# Altium PCB Copy of corePCB3.PcbDoc (part 1 of 3)
Units mil, origin at the board's own origin, x right, y up, seen from the top; angles counter-clockwise.
Board outline 6000 x 4000 mil, 6 copper layers (Top Layer, Layer 3, Layer 1, Layer 2, Layer 4, Bottom Layer), stack 32.111 mil thick; 90 components, 166 nets, 637 pads, 472 vias.
Unrouted connection lines stored in the file: 122.
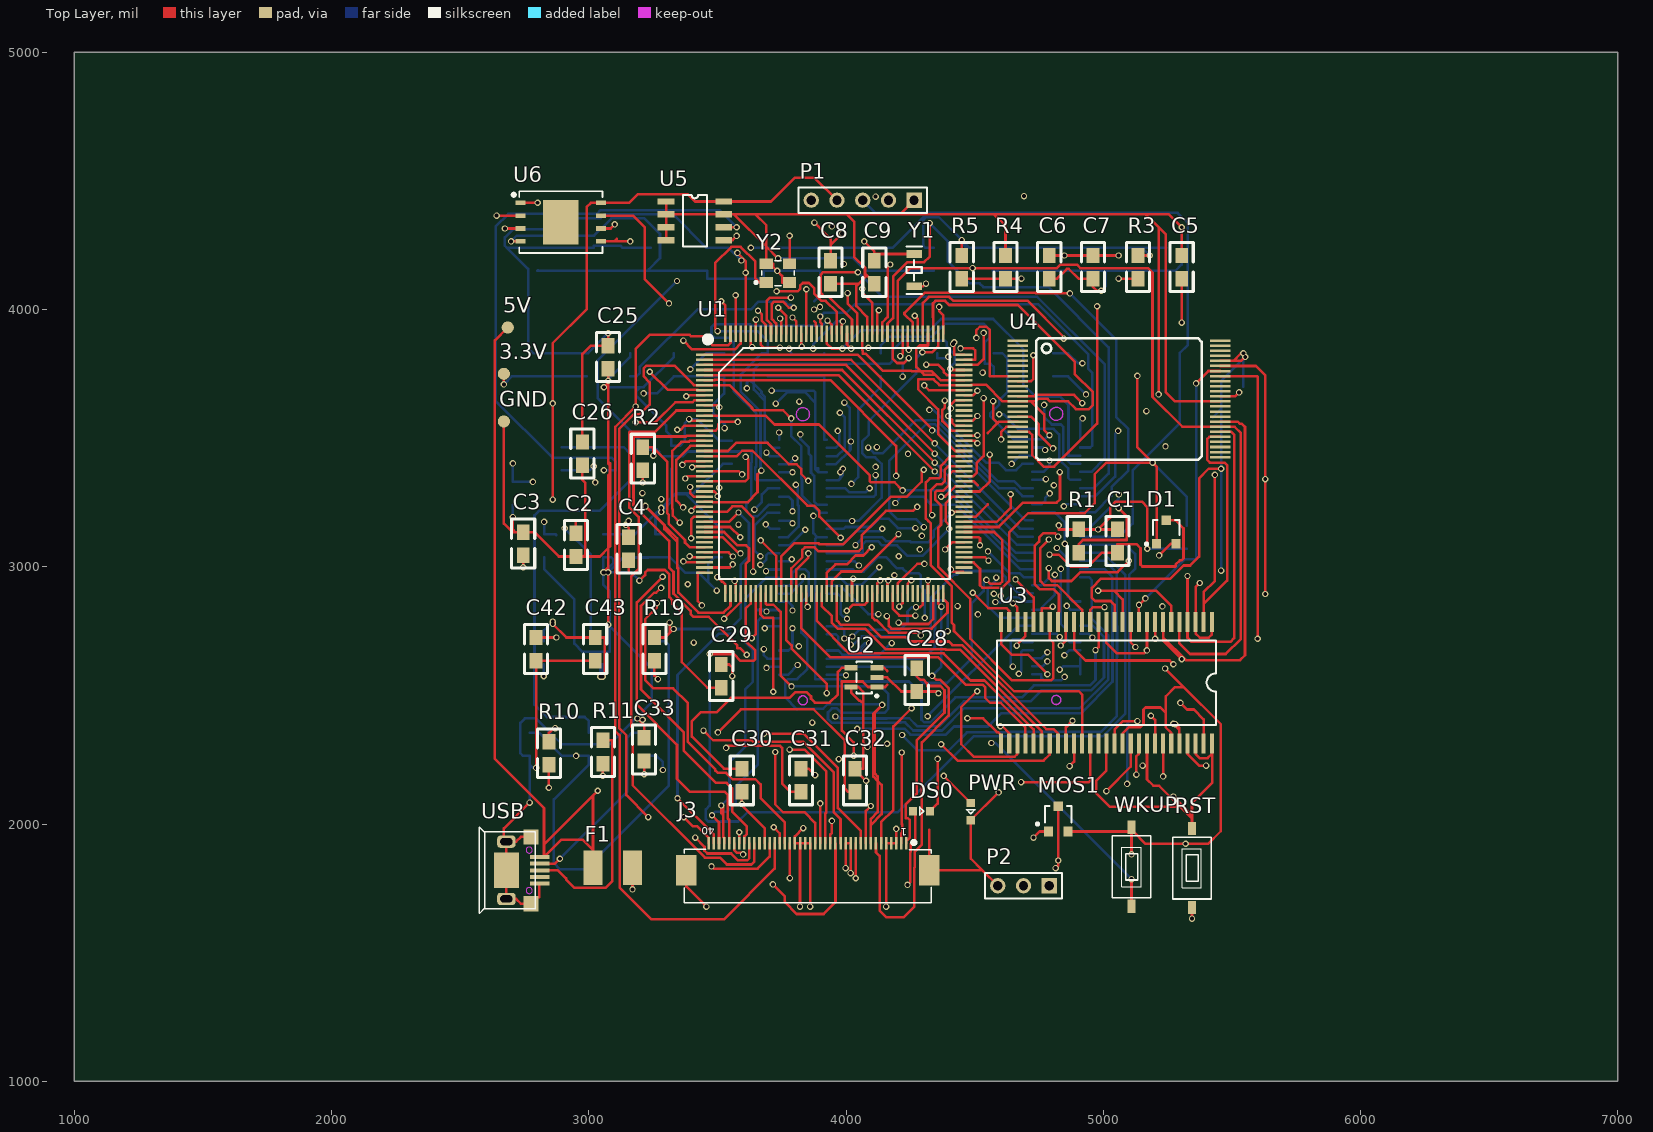
[diagram p0: Top Layer view]
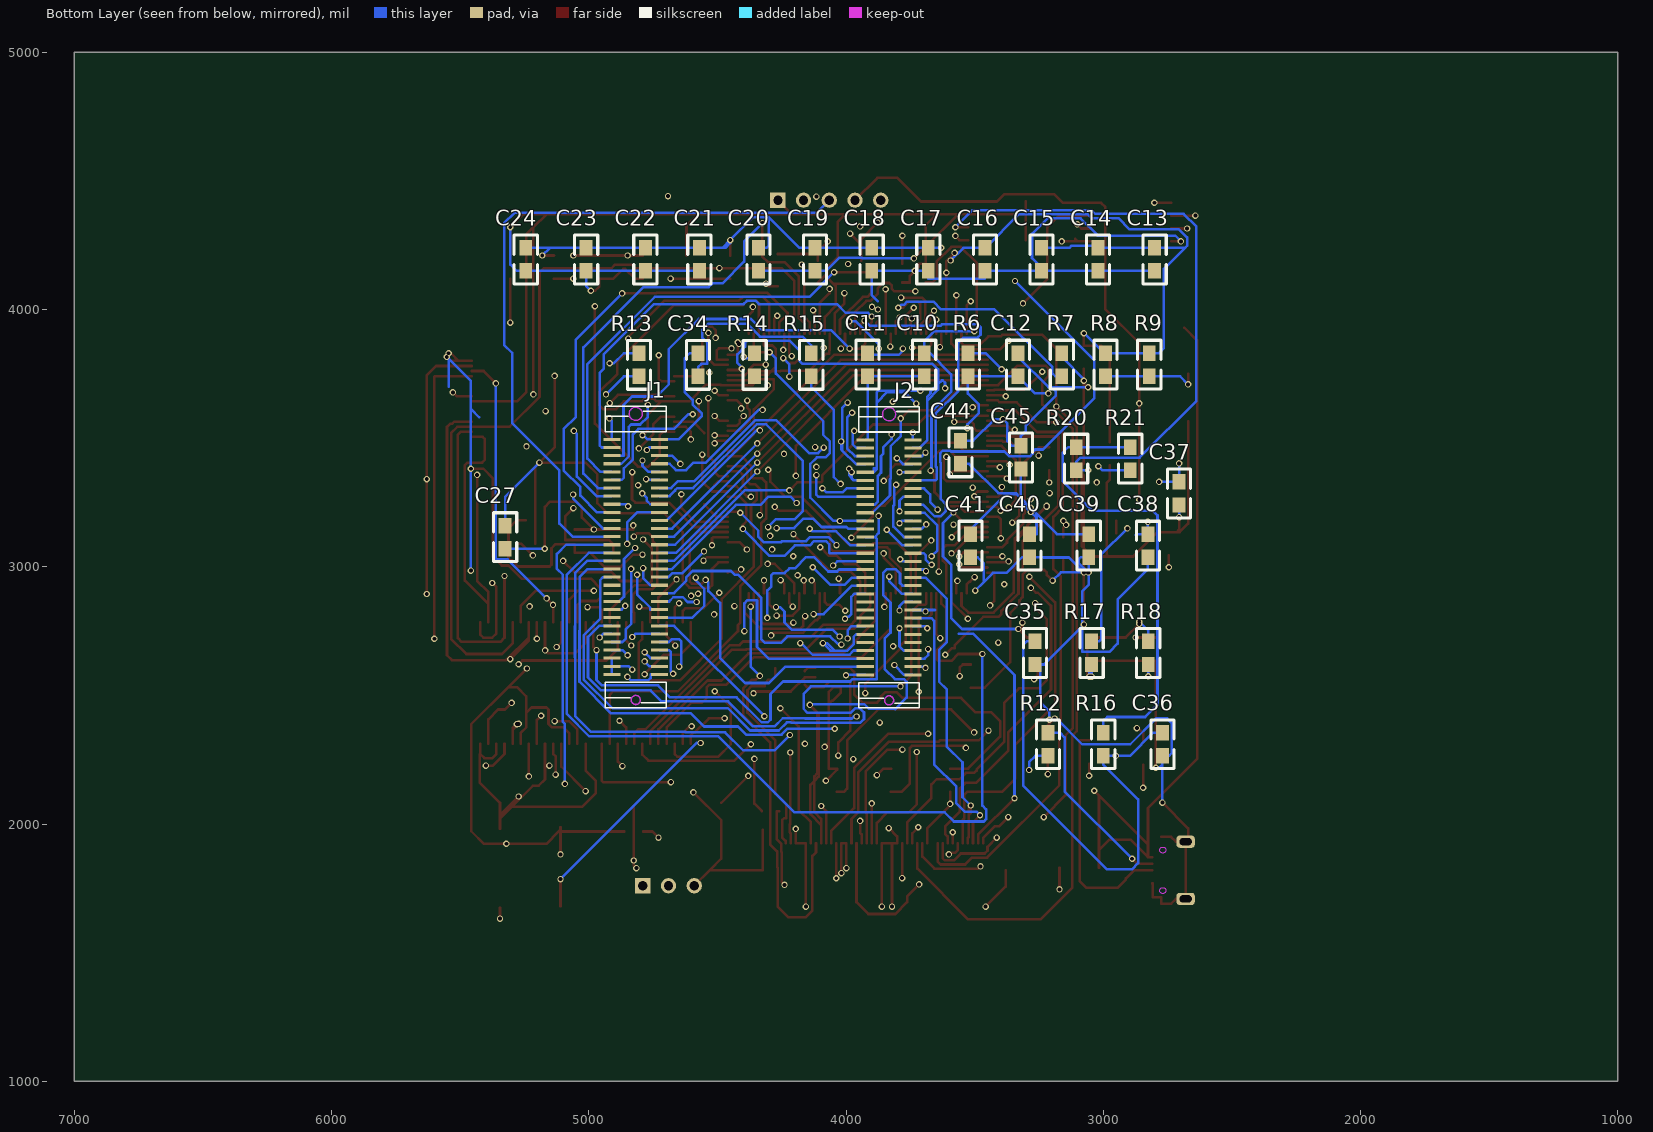
[diagram p1: Bottom Layer view, seen from below]
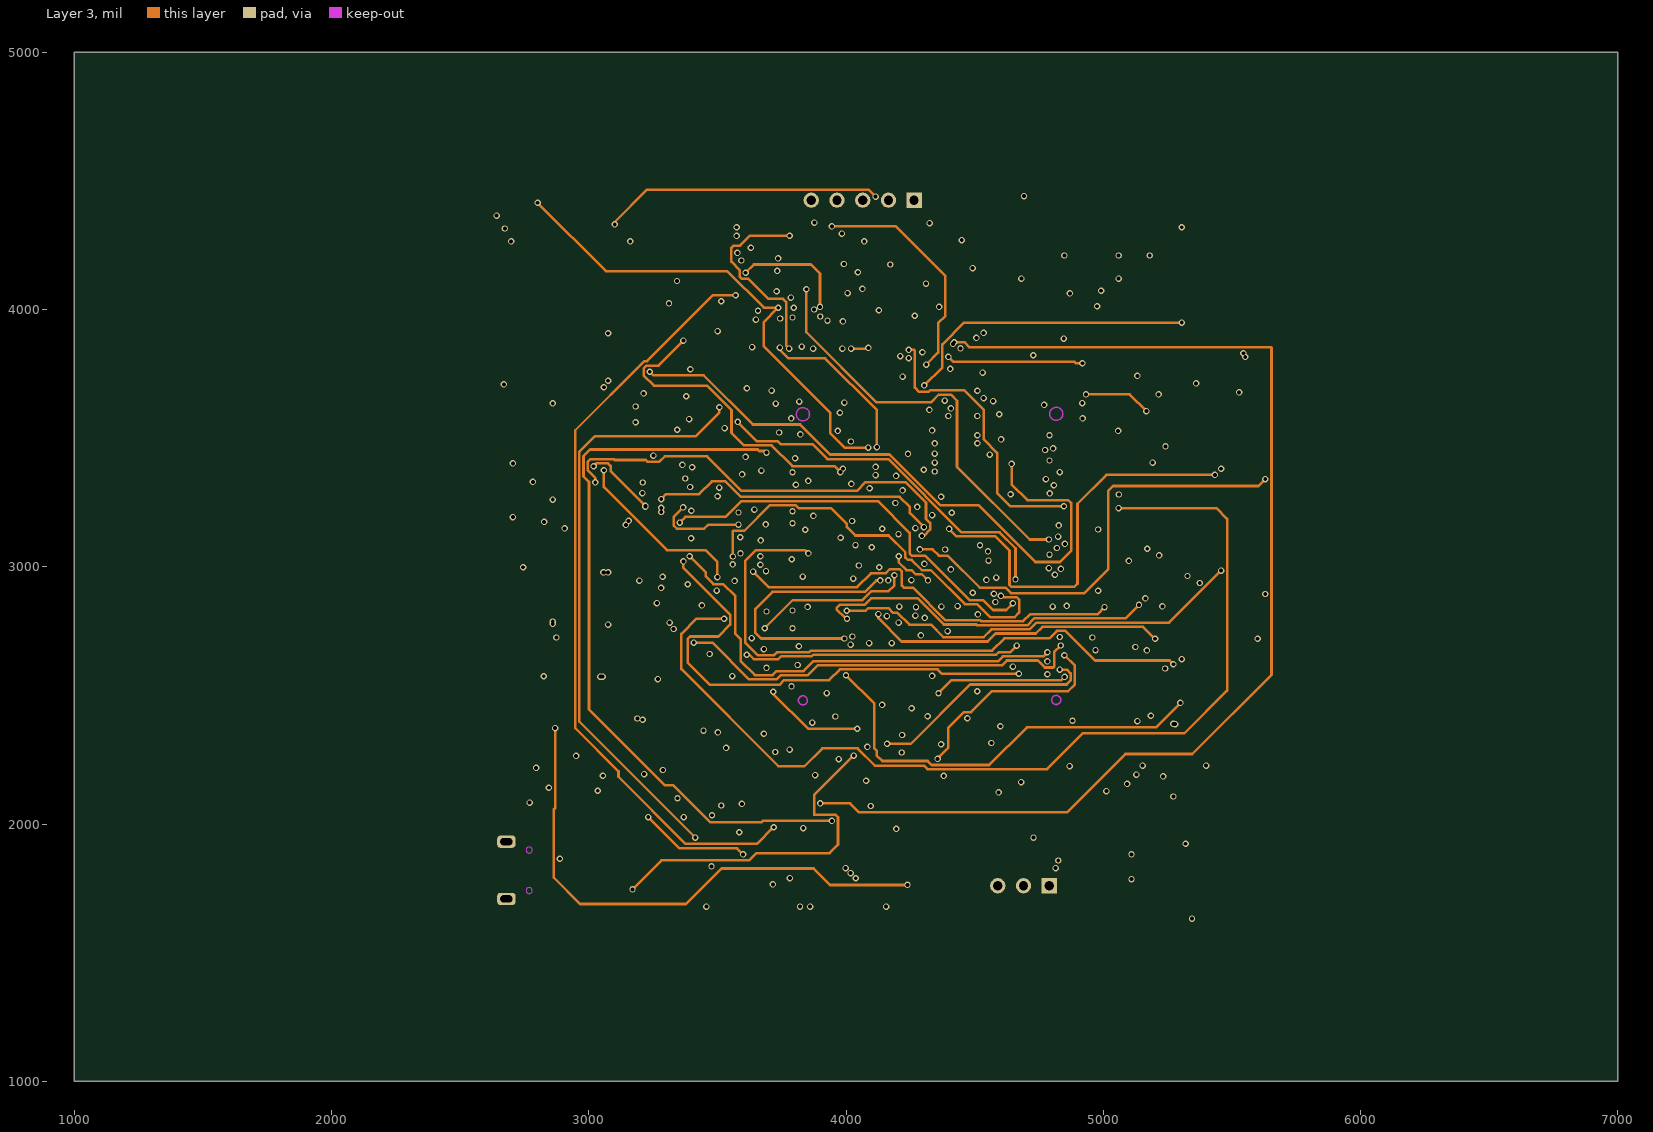
[diagram p2: Layer 3]
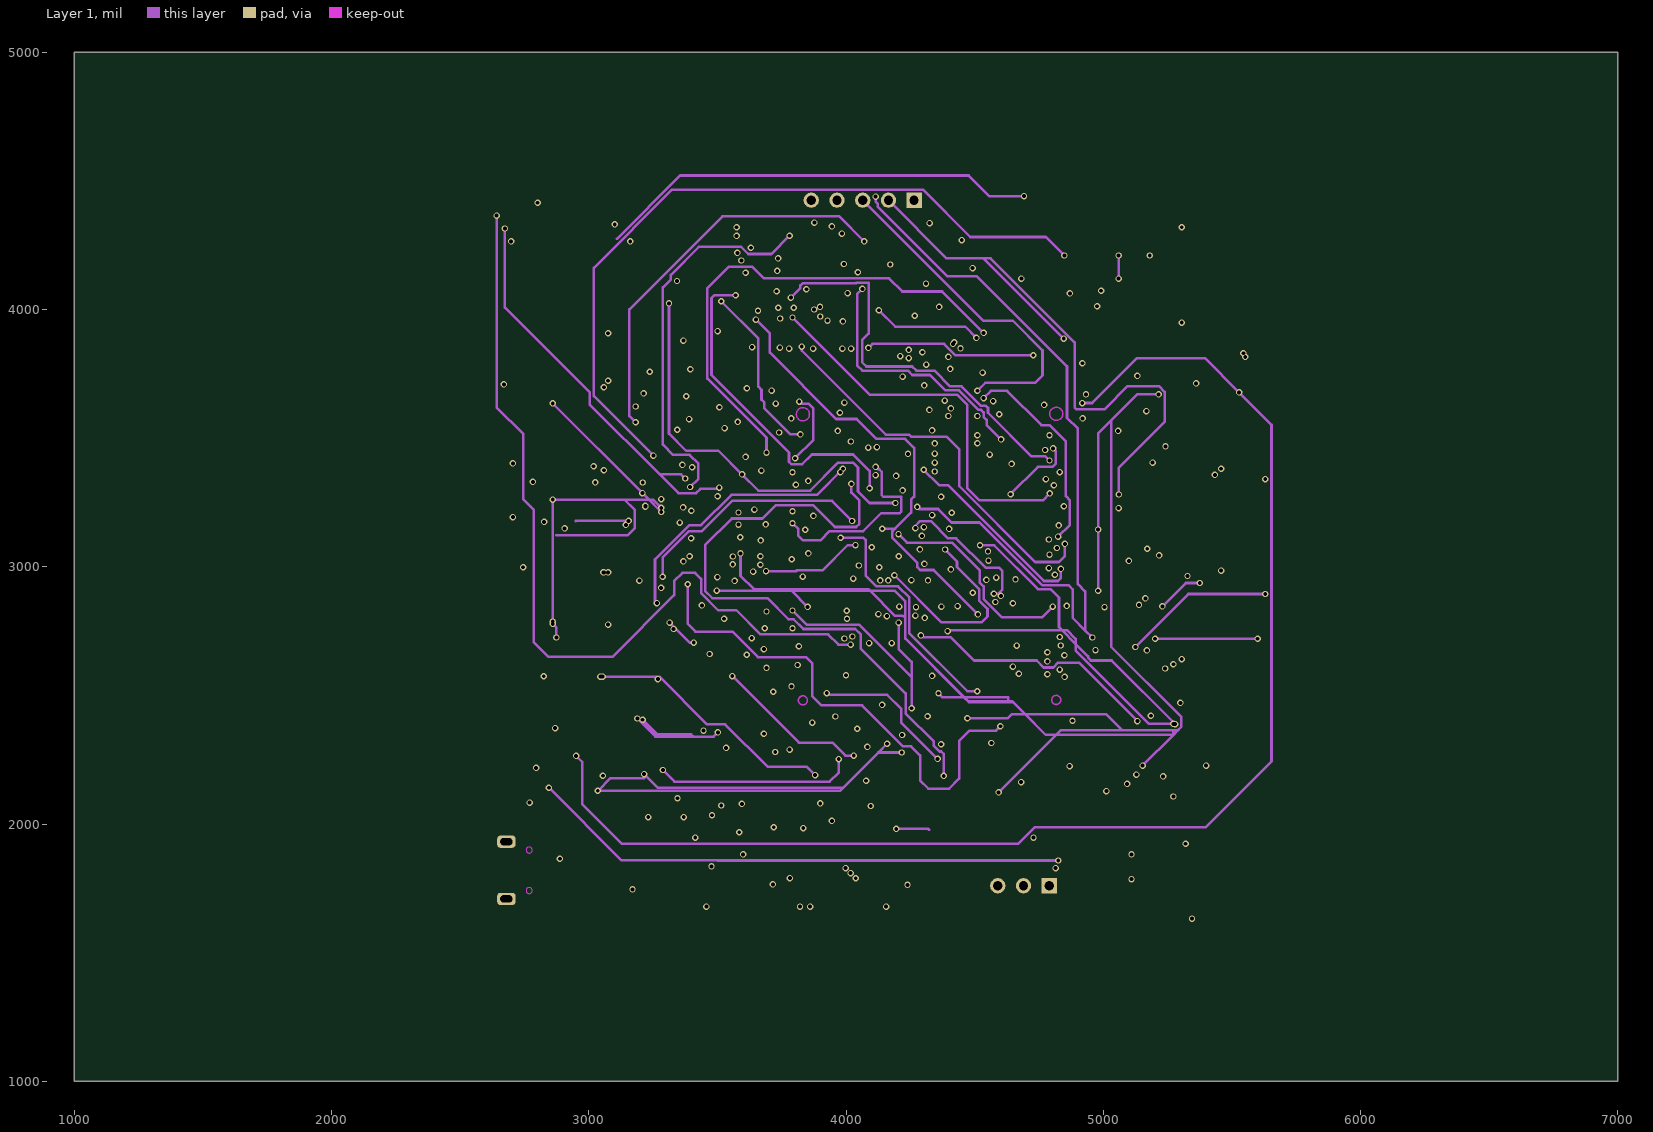
[diagram p3: Layer 1]
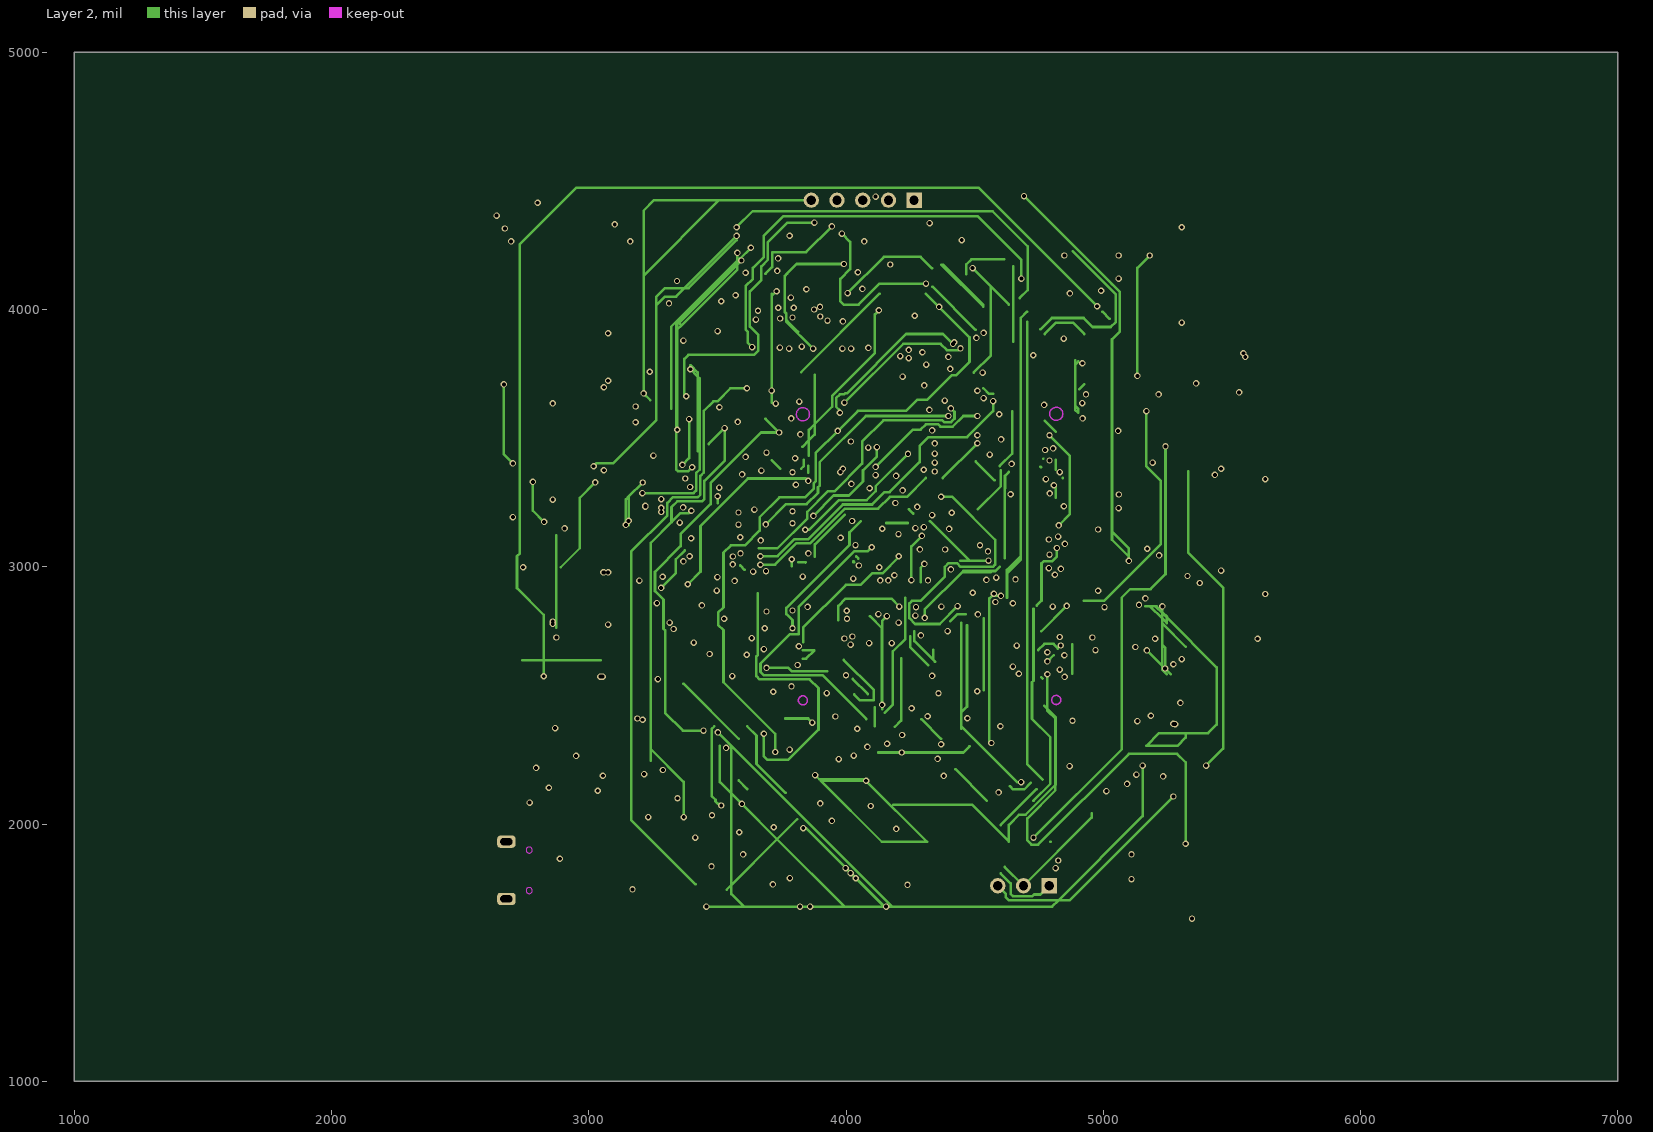
[diagram p4: Layer 2]
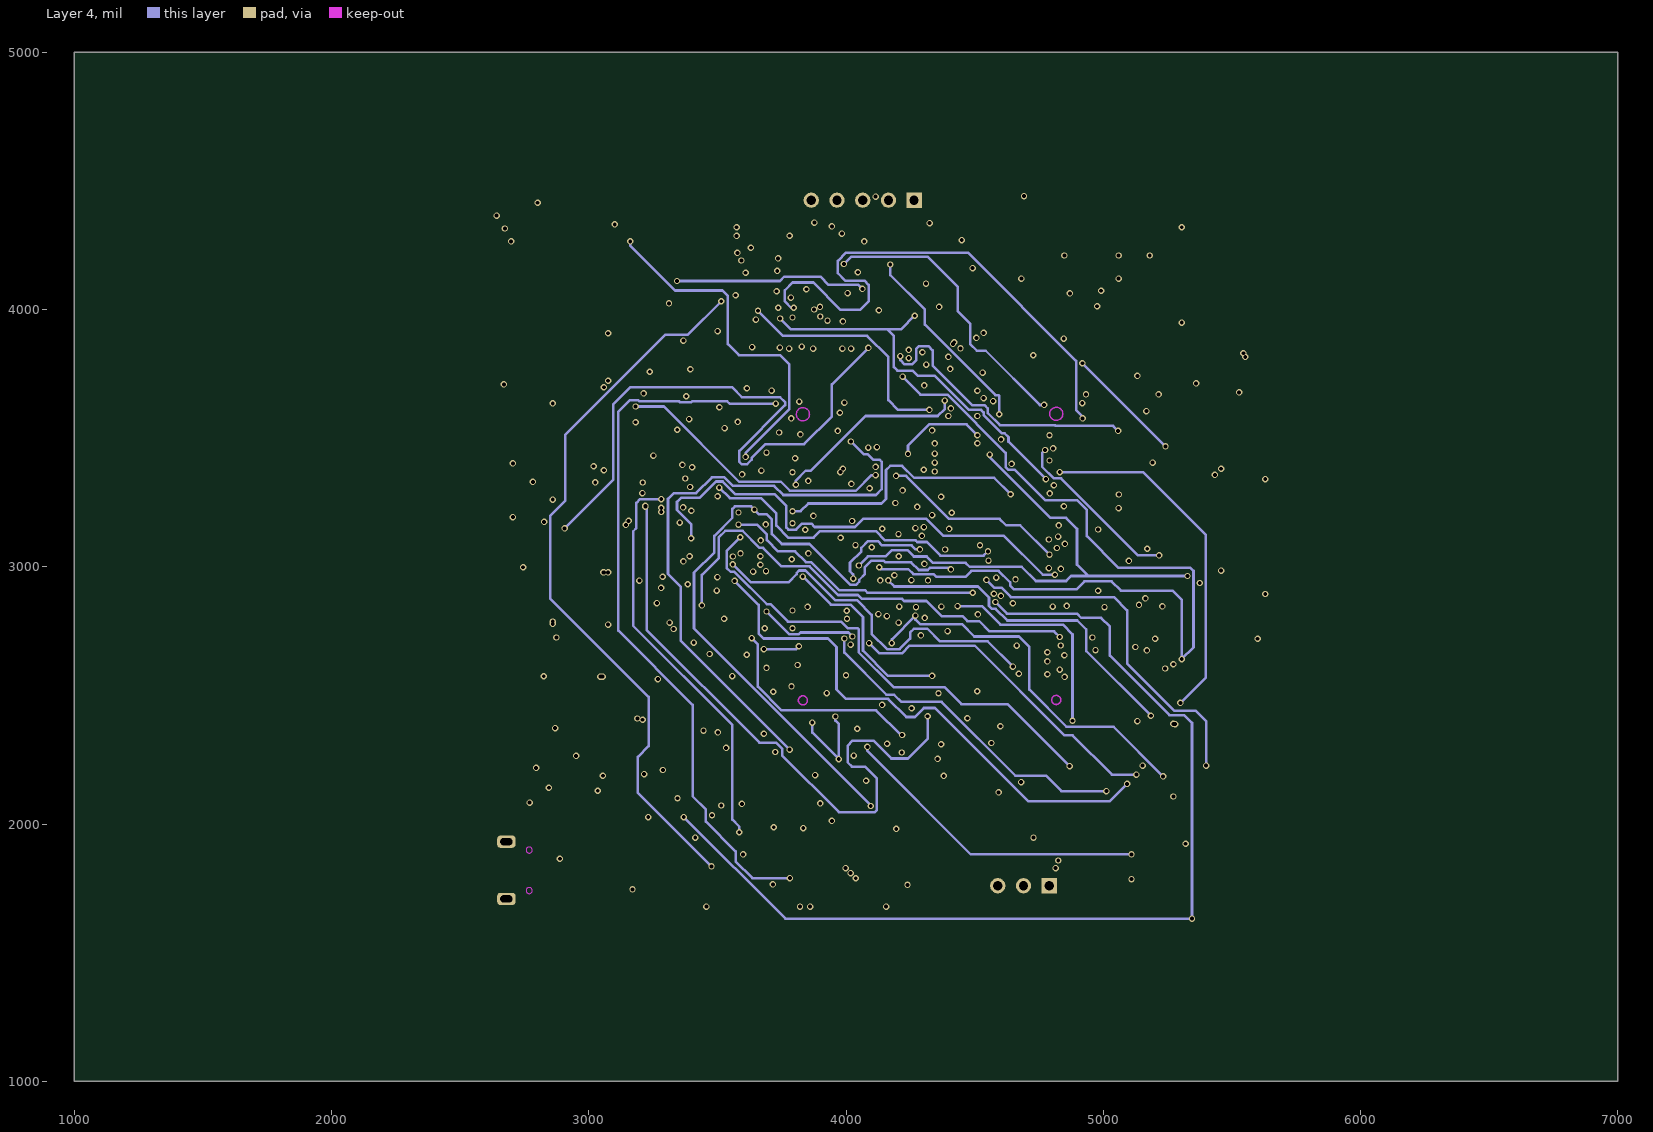
[diagram p5: Layer 4]

## Layer stack, top to bottom
Top Solder: solder mask 0.4, Solder Resist, Dk 3.5
Top Layer: signal copper 1.4
Dielectric 2: prepreg 2.8, PP-006, Dk 4.1
Layer 3: signal copper 1.3779
Dielectric 4: prepreg 2.8, PP-006, Dk 4.1
Layer 1: signal copper 1.3778
Dielectric 1: dielectric 12.6, FR-4, Dk 4.8
Layer 2: signal copper 1.3778
Dielectric 5: prepreg 2.8, PP-006, Dk 4.1
Layer 4: signal copper 1.3779
Dielectric 3: prepreg 2.8, PP-006, Dk 4.1
Bottom Layer: signal copper 1.4
Bottom Solder: solder mask 0.4, Solder Resist, Dk 3.5

## Board outline
1000,1000 7000,1000 7000,5000 1000,5000

## Design rules (kind name [scope] priority, off if disabled: settings)
Clearance [All] p1: gap=6 ignorepadtopadclearanceinfootprint=TRUE except(0: Arc-Hole Track-Hole SMDPad-Hole THPad-Hole Via-Hole Fill-Hole Poly-Hole Region-Hole Text-Hole)
ComponentClearance [All] p1 off: gap=10 collisioncheckmode=3 verticalgap=10 showdistances=FALSE
DiffPairsRouting [All] p1 off: maxlimit=10 minlimit=10 mostfreqgap=10 toplayer_minwidth=15 toplayer_maxwidth=15 toplayer_prefwidth=15 midlayer1_minwidth=15 midlayer1_maxwidth=15 midlayer1_prefwidth=15 midlayer2_minwidth=15 midlayer2_maxwidth=15 midlayer2_prefwidth=15 midlayer3_minwidth=15 midlayer3_maxwidth=15 midlayer3_prefwidth=15 midlayer4_minwidth=15 midlayer4_maxwidth=15 midlayer4_prefwidth=15 bottomlayer_minwidth=15 bottomlayer_maxwidth=15 bottomlayer_prefwidth=15 maxuncoupledlength=500
FanoutControl Fanout_BGA [IsBGA] p1 off: bgadir=Out bgaviamode=Centered fanoutstyle=Auto fanoutdirection=Alternating viagrid=1 // Fanout_BGA (Default Rule)
FanoutControl Fanout_LCC [IsLCC] p2 off: bgadir=Out bgaviamode=Centered fanoutstyle=Auto fanoutdirection=Alternating viagrid=1 // Fanout_LCC (Default Rule)
FanoutControl Fanout_SOIC [IsSOIC] p3 off: bgadir=Out bgaviamode=Centered fanoutstyle=Auto fanoutdirection=Alternating viagrid=1 // Fanout_SOIC (Default Rule)
FanoutControl Fanout_Small [(CompPinCount < 5)] p4 off: bgadir=Out bgaviamode=Centered fanoutstyle=Auto fanoutdirection=OutThenIn viagrid=1 // Fanout_Small (Default Rule)
FanoutControl Fanout_Default [All] p5 off: bgadir=Out bgaviamode=Centered fanoutstyle=Auto fanoutdirection=Alternating viagrid=1 // Fanout_Default (Default Rule)
Height [All] p1 off: minheight=0 maxheight=1000 prefheight=500
PolygonConnect [All] p1: connectstyle=Relief reliefconductorwidth=10 reliefentries=4 polygonreliefangle="90 Angle" airgapwidth=10
RoutingCorners [All] p1 off: cornerstyle=45-Degree minsetback=100 maxsetback=100
RoutingLayers [All] p1 off: top layer_v5=TRUE mid layer 1_v5=TRUE mid layer 2_v5=TRUE mid layer 3_v5=TRUE mid layer 4_v5=TRUE bottom layer_v5=TRUE
RoutingPriority [All] p1 off: routingpriority=0
RoutingTopology [All] p1 off: topology=Shortest
RoutingVias [All] p1: holewidth=15 width=25 viastyle="Through Hole" minholewidth=15 minwidth=25 maxholewidth=15 maxwidth=25
SMDToCorner [All] p1: distance=0
SolderMaskExpansion [All] p1: expansion=4
Width [All] p1 off: maxlimit=10 minlimit=10 preferedwidth=10
18 further rules are at their usual default settings.

## Classes and differential pairs
component class stm: C1 C2 C3 C4 C5 C6 C7 C8 C9 C10 C11 C12 C13 C14 C15 C16 C17 C18 C19 C20 C21 C22 C23 C24 C25 C26 C27 D1 J1 J2 P1 R1 R2 R3 R4 R5 R6 R7 R8 R9 RST U1 Y1 Y2
component class mem: C35 C36 C37 C38 C39 C40 C41 C42 C43 C44 C45 R16 R17 R18 R19 R20 R21 U3 U4 U5 U6
component class circuit: 3.3V 5V C28 C29 C30 C31 C32 C33 C34 DS0 F1 GND J3 MOS1 P2 PWR R10 R11 R12 R13 R14 R15 U2 USB WKUP

## Components (designator, comment, footprint, x,y, rotation, side; value= is the part's Value field where it differs from the comment)
3.3V "TEST POINT" TP-1.5 2670,3750 r90 top
5V "TEST POINT" TP-1.5 2685,3930 r0 top
C1 "104" 0805 5055,3055 r90 top
C2 "104" 0805 2950,3040 r90 top
C3 "225" 0805 2745,3045 r90 top
C4 "225" 0805 3155,3025 r90 top
C5 "225" 0805 5305,4120 r90 top
C6 "10uF" 0805 4790,4120 r90 top
C7 "104" 0805 4960,4120 r90 top
C8 "6pF" 0805 3940,4100 r90 top
C9 "6pF" 0805 4110,4100 r90 top
C10 "22pF" 0805 3696.13,3740.59 r90 bottom
C11 "22pF" 0805 3916.13,3740.59 r90 bottom
C12 "104" 0805 3331.13,3740.59 r90 bottom
C13 "104" 0805 2800.13,4150 r90 bottom
C14 "104" 0805 3020.13,4150 r90 bottom
C15 "104" 0805 3240.13,4150 r90 bottom
C16 "104" 0805 3460.13,4150 r90 bottom
C17 "104" 0805 3680.13,4150 r90 bottom
C18 "104" 0805 3900.13,4150 r90 bottom
C19 "104" 0805 4120.13,4150 r90 bottom
C20 "104" 0805 4340.13,4150 r90 bottom
C21 "104" 0805 4570.13,4150 r90 bottom
C22 "104" 0805 4780.13,4150 r90 bottom
C23 "104" 0805 5010.13,4150 r90 bottom
C24 "104" 0805 5245.13,4150 r90 bottom
C25 "104" 0805 3074.94,3770 r90 top
C26 "104" 0805 2975,3395 r90 top
C27 "104" 0805 5325,3070 r90 bottom
C28 "104" 0805 4274.94,2515 r90 top
C29 "10uF" 0805 3514.94,2530 r90 top
C30 "103" 0805 3595,2125 r90 top
C31 "104" 0805 3825,2125 r90 top
C32 "10uF" 0805 4035,2125 r90 top
C33 "104" 0805 3214.94,2245 r90 top
C34 "104" 0805 4575.13,3740 r90 bottom
C35 "104" 0805 3265.13,2620 r90 bottom
C36 "104" 0805 2770.13,2265 r90 bottom
C37 "104" 0805 2705.06,3240 r90 bottom
C38 "104" 0805 2826.45,3036.93 r90 bottom
C39 "104" 0805 3056.45,3036.93 r90 bottom
C40 "104" 0805 3286.45,3036.93 r90 bottom
C41 "104" 0805 3516.45,3036.93 r90 bottom
C42 "104" 0805 2795,2635 r90 top
C43 "104" 0805 3025,2635 r90 top
C44 "104" 0805 3555.13,3400 r90 bottom
C45 "104" 0805 3320.13,3380 r90 bottom
D1 "BAT54C" SOT-23 5245,3130 r0 top
DS0 "LED" SMDLED-0603 4260,2050 r0 top
F1 "1812L075PR" *1812 3093.23,1830 r0 top
GND "TEST POINT" TP-1.5 2670,3565 r90 top
J1 "3710M060046G3FT01" 3710F060046G3FT01 4910,2581.61 r0 bottom
J2 "3710M060046G3FT01" 3710F060046G3FT01 3925.04,2580.04 r0 bottom
J3 "RGBLCD" FPC-TOP40 4234.65,1929 r180 top
MOS1 "SI2301" SO-G3/C2.5 4825,2020 r0 top
P1 "SWD" HDR1X5 4265,4425 r180 top
P2 "USART1" HDR1X3 4790,1760 r180 top
PWR "LED" SMDLED-0603 4485,2081.93 r270 top
R1 "10K" 0805 4905,3055 r90 top
R2 "10R" 0805 3209.94,3375 r90 top
R3 "10R" 0805 5135,4120 r90 top
R4 "0R" 0805 4620,4120 r90 top
R5 "0R" 0805 4450,4120 r90 top
R6 "10K" 0805 3526.13,3740.59 r90 bottom
R7 "100K" 0805 3161.13,3740.59 r90 bottom
R8 "0R" 0805 2991.13,3740.59 r90 bottom
R9 "0R" 0805 2821.13,3740.59 r90 bottom
R10 "1K" 0805 2844.94,2230 r90 top
R11 "10R" 0805 3055,2235 r90 top
R12 "10R" 0805 3215.06,2265 r90 bottom
R13 "10R" 0805 4805.13,3740 r90 bottom
R14 "100K" 0805 4355.13,3740 r90 bottom
R15 "1K" 0805 4135.13,3740 r90 bottom
R16 "0R" 0805 3000.13,2265 r90 bottom
R17 "10K" 0805 3045.13,2620 r90 bottom
R18 "10K" 0805 2825.13,2620 r90 bottom
R19 "10K" 0805 3255,2635 r90 top
R20 "4.7K" 0805 3105.13,3375 r90 bottom
R21 "4.7K" 0805 2895.13,3375 r90 bottom
RST "KEY_M" KEY_SOP3625 5345,1675 r90 top
U1 "STM32F767IGT6" LQFP176 3450,3824.02 r0 top
U2 "CAT6219-330TD" SOT-23-5 4120,2532.6 r180 top
U3 "W9825G6KH" TSOP54 5421.97,2785 r270 top
U4 "MT29F4G08" TSOP48 4667.6,3879.01 r0 top
U5 "24C02" SOP-8 3300.59,4420 r0 top
U6 "W25Q256" WSON8 2891.5,4340 r0 top
USB "USB-AB" "USB_AB - 5S - B" 2595,1820 r90 top
WKUP "KEY_UP" KEY_SOP3625 5110,1680 r90 top
Y1 "32.768KHz" XTAL3215 4265,4090 r90 top
Y2 "25Mhz" XTAL3225 3690,4105 r0 top

## Footprints (in the part's own frame and the unit in brackets; to place one, negate y for a bottom-side part, rotate by r counter-clockwise, add the part's x,y. Pads: shape width x height; smd on the part's side, far side on the other; paste and mask are expansions set on the pad)
0805 [mil]
  rect 60x50 smd: 1(0,-0.06) 2(90,-0.06)
  silkscreen extent -50,-45 140,45
3710F060046G3FT01 [mm]
  rect 1.7x0.3 smd: 1(-4.7,0) 2(-4.7,-0.8) 3(-4.7,-1.6) 4(-4.7,-2.4) 5(-4.7,-3.2) 6(-4.7,-4) 7(-4.7,-4.8) 8(-4.7,-5.6) 9(-4.7,-6.4) 10(-4.7,-7.2) 11(-4.7,-8) 12(-4.7,-8.8) 13(-4.7,-9.6) 14(-4.7,-10.4) 15(-4.7,-11.2) 16(-4.7,-12) 17(-4.7,-12.8) 18(-4.7,-13.6) 19(-4.7,-14.4) 20(-4.7,-15.2) 21(-4.7,-16) 22(-4.7,-16.8) 23(-4.7,-17.6) 24(-4.7,-18.4) 25(-4.7,-19.2) 26(-4.7,-20) 27(-4.7,-20.8) 28(-4.7,-21.6) 29(-4.7,-22.4) 30(-4.7,-23.2) 31(0,-23.2) 32(0,-22.4) 33(0,-21.6) 34(0,-20.8) 35(0,-20) 36(0,-19.2) 37(0,-18.4) 38(0,-17.6) 39(0,-16.8) 40(0,-16) 41(0,-15.2) 42(0,-14.4) 43(0,-13.6) 44(0,-12.8) 45(0,-12) 46(0,-11.2) 47(0,-10.4) 48(0,-9.6) 49(0,-8.8) 50(0,-8) 51(0,-7.2) 52(0,-6.4) 53(0,-5.6) 54(0,-4.8) 55(0,-4) 56(0,-3.2) 57(0,-2.4) 58(0,-1.6) 59(0,-0.8) 60(0,0)
  Keep-Out Layer circle w0.152: c-2.35,-25.725 r0.65
  Keep-Out Layer circle w0.152: c-2.35,2.525 r0.45
  silkscreen extent -5.35,-26.48 0.65,3.27
*1812 [mm]
  rect 1.9x3.4 smd: 1(-1.95,0) 2(1.95,0)
FPC-TOP40 [mm]
  rect 0.25x1.2 smd: 1(0,0.102) 2(0.5,0.102) 3(1,0.102) 4(1.5,0.102) 5(2,0.102) 6(2.5,0.102) 7(3,0.102) 8(3.5,0.102) 9(4,0.102) 10(4.5,0.102) 11(5,0.102) 12(5.5,0.102) 13(6,0.102) 14(6.5,0.102) 15(7,0.102) 16(7.5,0.102) 17(8,0.102) 18(8.5,0.102) 19(9,0.102) 20(9.5,0.102) 21(10,0.102) 22(10.5,0.102) 23(11,0.102) 24(11.5,0.102) 25(12,0.102) 26(12.5,0.102) 27(13,0.102) 28(13.5,0.102) 29(14,0.102) 30(14.5,0.102) 31(15,0.102) 32(15.5,0.102) 33(16,0.102) 34(16.5,0.102) 35(17,0.102) 36(17.5,0.102) 37(18,0.102) 38(18.5,0.102) 39(19,0.102) 40(19.5,0.102)
  rect 2x3 smd: A(-2.25,2.754) B(21.725,2.754)
  silkscreen extent -2.45,-0.15 21.92,5.97
HDR1X3 [mm]
  rect 1.5x1.5 hole 0.9: 1(0,0)
  round 1.5 hole 0.9: 2(2.54,0) 3(5.08,0)
  silkscreen extent -1.27,-1.27 6.35,1.27
HDR1X5 [mm]
  rect 1.5x1.5 hole 0.9: 1(0,0)
  round 1.5 hole 0.9: 2(2.54,0) 3(5.08,0) 4(7.62,0) 5(10.16,0)
  silkscreen extent -1.27,-1.27 11.43,1.27
KEY_SOP3625 [mm]
  rect 1.3x0.8 smd: 1(0,0) 2(7.8,0)
  silkscreen extent 0.85,-1.9 6.95,1.9
LQFP176 [mm]
  rect 1.65x0.254 smd: 1(0,0) 2(0,-0.5) 3(0,-1) 4(0,-1.5) 5(0,-2) 6(0,-2.5) 7(0,-3) 8(0,-3.5) 9(0,-4) 10(0,-4.5) 11(0,-5) 12(0,-5.5) 13(0,-6) 14(0,-6.5) 15(0,-7) 16(0,-7.5) 17(0,-8) 18(0,-8.5) 19(0,-9) 20(0,-9.5) 21(0,-10) 22(0,-10.5) 23(0,-11) 24(0,-11.5) 25(0,-12) 26(0,-12.5) 27(0,-13) 28(0,-13.5) 29(0,-14) 30(0,-14.5) 31(0,-15) 32(0,-15.5) 33(0,-16) 34(0,-16.5) 35(0,-17) 36(0,-17.5) 37(0,-18) 38(0,-18.5) 39(0,-19) 40(0,-19.5) 41(0,-20) 42(0,-20.5) 43(0,-21) 44(0,-21.5) 89(25.631,-21.5) 90(25.631,-21) 91(25.631,-20.5) 92(25.631,-20) 93(25.631,-19.5) 94(25.631,-19) 95(25.631,-18.5) 96(25.631,-18) 97(25.631,-17.5) 98(25.631,-17) 99(25.631,-16.5) 100(25.631,-16) 101(25.631,-15.5) 102(25.631,-15) 103(25.631,-14.5) 104(25.631,-14) 105(25.631,-13.5) 106(25.631,-13) 107(25.631,-12.5) 108(25.631,-12) 109(25.631,-11.5) 110(25.631,-11) 111(25.631,-10.5) 112(25.631,-10) 113(25.631,-9.5) 114(25.631,-9) 115(25.631,-8.5) 116(25.631,-8) 117(25.631,-7.5) 118(25.631,-7) 119(25.631,-6.5) 120(25.631,-6) 121(25.631,-5.5) 122(25.631,-5) 123(25.631,-4.5) 124(25.631,-4) 125(25.631,-3.5) 126(25.631,-3) 127(25.631,-2.5) 128(25.631,-2) 129(25.631,-1.5) 130(25.631,-1) 131(25.631,-0.5) 132(25.631,0)
  rect 0.254x1.65 smd: 45(2.065,-23.566) 46(2.566,-23.566) 47(3.066,-23.566) 48(3.565,-23.566) 49(4.066,-23.566) 50(4.565,-23.566) 51(5.066,-23.566) 52(5.565,-23.566) 53(6.066,-23.566) 54(6.565,-23.566) 55(7.066,-23.566) 56(7.565,-23.566) 57(8.066,-23.566) 58(8.565,-23.566) 59(9.066,-23.566) 60(9.565,-23.566) 61(10.066,-23.566) 62(10.565,-23.566) 63(11.066,-23.566) 64(11.565,-23.566) 65(12.066,-23.566) 66(12.565,-23.566) 67(13.066,-23.566) 68(13.565,-23.566) 69(14.066,-23.566) 70(14.565,-23.566) 71(15.066,-23.566) 72(15.566,-23.566) 73(16.066,-23.566) 74(16.566,-23.566) 75(17.065,-23.566) 76(17.566,-23.566) 77(18.065,-23.566) 78(18.566,-23.566) 79(19.065,-23.566) 80(19.566,-23.566) 81(20.065,-23.566) 82(20.566,-23.566) 83(21.065,-23.566) 84(21.566,-23.566) 85(22.065,-23.566) 86(22.566,-23.566) 87(23.065,-23.566) 88(23.566,-23.566) 133(23.566,2.065) 134(23.065,2.065) 135(22.566,2.065) 136(22.065,2.065) 137(21.566,2.065) 138(21.065,2.065) 139(20.566,2.065) 140(20.065,2.065) 141(19.566,2.065) 142(19.065,2.065) 143(18.566,2.065) 144(18.065,2.065) 145(17.566,2.065) 146(17.065,2.065) 147(16.566,2.065) 148(16.066,2.065) 149(15.566,2.065) 150(15.066,2.065) 151(14.565,2.065) 152(14.066,2.065) 153(13.565,2.065) 154(13.066,2.065) 155(12.565,2.065) 156(12.066,2.065) 157(11.565,2.065) 158(11.066,2.065) 159(10.565,2.065) 160(10.066,2.065) 161(9.565,2.065) 162(9.066,2.065) 163(8.565,2.065) 164(8.066,2.065) 165(7.565,2.065) 166(7.066,2.065) 167(6.565,2.065) 168(6.066,2.065) 169(5.565,2.065) 170(5.066,2.065) 171(4.565,2.065) 172(4.066,2.065) 173(3.565,2.065) 174(3.066,2.065) 175(2.566,2.065) 176(2.065,2.065)
  silkscreen extent 0.04,-22.15 24.22,1.82
SMDLED-0603 [mil]
  rect 32x32 smd: 1(0,0) 2(66.93,0)
  silkscreen extent 26,-17 42,17
SO-G3/C2.5 [mm]
  rect 0.9x0.95 smd: 1(-0.95,-1.25) 2(0.95,-1.25) 3(0,1.25)
  silkscreen extent -2.15,-0.63 1.3,1.25
SOP-8 [mil]
  rect 65x25 smd: 1(0,0) 2(0,-50) 3(0,-100) 4(0,-150) 5(224.41,-150) 6(224.41,-100) 7(224.41,-50) 8(224.41,0)
  silkscreen extent 65,-175 159,25
SOT-23 [mm]
  rect 0.9x0.95 smd: 1(-0.95,-1.048) 2(0.95,-1.048) 3(0,1.302)
  silkscreen extent -2.07,-1.17 1.3,1.3
SOT-23-5 [mil]
  rect 50x20 smd: 1(0,0) 2(0,-37.4) 3(0,-74.8) 4(100,-74.8) 5(100,0)
  silkscreen extent 0,-99 80,35
TP-1.5 [mm]
  round 1.2 smd: 1(0,0)
TSOP48 [mm]
  rect 2x0.25 smd: 1(0,0) 2(0,-0.5) 3(0,-1) 4(0,-1.5) 5(0,-2) 6(0,-2.5) 7(0,-3) 8(0,-3.5) 9(0,-4) 10(0,-4.5) 11(0,-5) 12(0,-5.5) 13(0,-6) 14(0,-6.5) 15(0,-7) 16(0,-7.5) 17(0,-8) 18(0,-8.5) 19(0,-9) 20(0,-9.5) 21(0,-10) 22(0,-10.5) 23(0,-11) 24(0,-11.5) 25(20,-11.5) 26(20,-11) 27(20,-10.5) 28(20,-10) 29(20,-9.5) 30(20,-9) 31(20,-8.5) 32(20,-8) 33(20,-7.5) 34(20,-7) 35(20,-6.5) 36(20,-6) 37(20,-5.5) 38(20,-5) 39(20,-4.5) 40(20,-4) 41(20,-3.5) 42(20,-3) 43(20,-2.5) 44(20,-2) 45(20,-1.5) 46(20,-1) 47(20,-0.5) 48(20,0)
  silkscreen extent 1.83,-11.75 18.17,0.25
TSOP54 [mm]
  rect 2x0.4 smd: 1(0,0) 2(0,-0.8) 3(0,-1.6) 4(0,-2.4) 5(0,-3.2) 6(0,-4) 7(0,-4.8) 8(0,-5.6) 9(0,-6.4) 10(0,-7.2) 11(0,-8) 12(0,-8.8) 13(0,-9.6) 14(0,-10.4) 15(0,-11.2) 16(0,-12) 17(0,-12.8) 18(0,-13.6) 19(0,-14.4) 20(0,-15.2) 21(0,-16) 22(0,-16.8) 23(0,-17.6) 24(0,-18.4) 25(0,-19.2) 26(0,-20) 27(0,-20.8) 28(12,-20.8) 29(12,-20) 30(12,-19.2) 31(12,-18.4) 32(12,-17.6) 33(12,-16.8) 34(12,-16) 35(12,-15.2) 36(12,-14.4) 37(12,-13.6) 38(12,-12.8) 39(12,-12) 40(12,-11.2) 41(12,-10.4) 42(12,-9.6) 43(12,-8.8) 44(12,-8) 45(12,-7.2) 46(12,-6.4) 47(12,-5.6) 48(12,-4.8) 49(12,-4) 50(12,-3.2) 51(12,-2.4) 52(12,-1.6) 53(12,-0.8) 54(12,0)
  silkscreen extent 1.83,-21.2 10.16,0.4
"USB_AB - 5S - B" [mm]
  rect 0.4x1.9 smd: 1(1.3,-5.436) 2(0.65,-5.436) 3(0,-5.436) 4(-0.65,-5.436) 5(-1.3,-5.436)
  rrect50% 1.2x1.8 hole 0.7 slot 1.2 at 90 deg: 6(2.825,-2.15) 7(-2.825,-2.15)
  rect 1.5x1.5 smd: 8(-3.302,-4.572) 9(3.302,-4.572)
  rect 3.5x2.5 smd: 9(0,-2.159)
  Keep-Out Layer circle w0.102: c2,-4.4 r0.3
  Keep-Out Layer circle w0.102: c-2,-4.4 r0.3
  silkscreen extent -4.26,-5 4.26,0.51
WSON8 [mm]
  rect 1x0.45 smd: 1(-3.975,1.905) 2(-3.975,0.635) 3(-3.975,-0.635) 4(-3.975,-1.905) 5(3.975,-1.905) 6(3.975,-0.635) 7(3.975,0.635) 8(3.975,1.905)
  rect 3.5x4.4 smd: 9(0,0)
  silkscreen extent -4.8,-3.05 4.1,3.05
XTAL3215 [mm]
  rect 0.75x1.5 smd: 1(0,0) 2(3.2,0)
  silkscreen extent -0.74,-0.75 3.94,0.75
XTAL3225 [mm]
  rect 1.3x1.05 smd: 1(0,0) 2(2.3,0) 3(2.3,1.85) 4(0,1.85)
  silkscreen extent -1.14,-0.33 2.74,2.17

## Part data
3.3V 5V GND: library part TEST-POINT, "测试点"
C1 C2 C3 C4 C5 C6 C7 C8 C9 C10 C11 C12 C13 C14 C15 C16 C17 C18 C19 C20 C21 C22 C23 C24 C25 C26 C27 C28 C29 C30 C31 C32 C33 C34 C35 C36 C37 C38 C39 C40 C41 C42 C43 C44 C45: library part C
D1: "双肖特基二极管"
F1: "PTC Resettable Fuse 0.75A_hold_ 1.5A_trip_ 13.2VDC 100A 0.8W 0.2s 0.1Ohm SMD Solder Pad 1812 T/R", Package="1812 Littelfuse", Availability=Unavailable, MF="Littelfuse Inc.", MP=1812L075PR, Price=None, SnapEDA_Link=https://www.snapeda.com/parts/1812L075PR/Littelfuse%20Inc./view-part/?ref=snap
J1 J2: library part 3710F, "3710F060046G3FT01"
J3: library part FPC-40, "FPC-40P-0.5mm"
MOS1: library part MOS-P, "IRLML6401/SI2301"
P1: library part "Header 5", "Header, 5-Pin", LatestRevisionDate=17-Jul-2002, LatestRevisionNote="Re-released for DXP Platform.", Publisher="Altium Limited"
P2: library part "Header 3", "Header, 3-Pin", LatestRevisionDate=17-Jul-2002, LatestRevisionNote="Re-released for DXP Platform.", Publisher="Altium Limited"
R1 R2 R3 R4 R5 R6 R7 R8 R9 R10 R11 R12 R13 R14 R15 R16 R17 R18 R19 R20 R21: library part R
U2: "3.3V 500mA LDO"
U3: library part IS42S16160B, "32MB SDRAM"
U4: library part K9F2G08U0C, "256MB NAND FLASH"
U5: library part 24C256, "EEPROM"
U6: library part W25Q128, "W25Q128"
USB: "MicroUSB"
WKUP: library part KEY_M
Y1: library part XTAL, "普通晶振"
Y2: library part XTAL_3225, "3225贴片无源晶振"

## Via types
v1: diameter 25, hole 15, Top Layer to Bottom Layer, 472 vias

## Nets (pads, with @x,y where several pads share a name; then routed paths per layer and width w, separated by ;. In a path a pad name is that pad's centre, name@x,y a point inside that pad or via, vN(x,y) a via of type N, cw(c..) or ccw(c..) an arc to the next point about the centre after c; other vN are vias at no path point)
1WIRE_DQ: J2.4 U1.92 | length 1126.9
  Top Layer w10: U1.92@4459.09,3036.61 4541.39,3036.61 v1(4554,3024)
  Layer 2 w10: v1(3792,2761) 3792,2793 3768.5,2816.5 3768.5,2840.5 4013.5,3085.5 4013.5,3133.5 4057.5,3177.5 ; 4245,3223 4261,3207 ; 4326.5,3177.5 4480,3024 ; 4444,3024 4480,3024 ; v1@4556,3024 v1(4554,3024) 4480,3024
  Bottom Layer w10: J2.4@3740,2674.53 3776,2674.53 3792,2690.53 v1(3792,2761)
BOOT0: J1.31 R7.1 U1.166 | length 3171.7
  Top Layer w10: U1.166@3728.17,3905.33 3728.17,3945.83 3711.5,3962.5 3711.5,4022 3720,4030.5 3754.5,4030.5 3778.04,4006.96 v1(3797,4006.96)
  Layer 4 w10: v1(3797,4006.96) 3787.04,4006.96 3762,4032 3762,4075 3792,4105 3873,4105 3979,3999 4055,3999 4088,4032 4088,4096 4072,4112 3997,4112 3968,4141 3968,4189 4000,4221 4474,4221 4894.83,3800.17 4894.83,3609.17 4920,3584 v1(4920,3577)
  Bottom Layer w10: R7.1@3161.07,3740.59 3186.59,3740.59 3198,3752 3198,3776 3423,4001 3630,4001 3660,4031 3762,4031 3774.54,4018.46 3785.5,4018.46 v1(3797,4006.96) ; J1.31@4910,3495 4910,3567 v1(4920,3577)
DCMI_D0: J2.16 U1.115 | length 1131.3
  Top Layer w10: U1.115@4459.09,3489.37 4501.63,3489.37 v1(4511,3480)
  Layer 2 w10: v1(3667,3008) 3724.1,3008 3807.6,3091.5 3861.35,3091.5 3995.89,3226.04 4125.04,3226.04 4170.5,3271.5 4236.5,3271.5 4310,3345 ; 4376,3345 v1(4511,3480)
  Bottom Layer w10: v1(3667,3008) 3671,3008 3690.5,3027.5 3690.5,3045.5 3697.48,3052.48 J2.16@3740,3052.48
DCMI_D1: J2.17 U1.116 | length 1065.9
  Top Layer w10: U1.116@4459.09,3509.06 4509.06,3509.06 v1(4511,3511)
  Layer 2 w10: v1(3841.75,3144) 3857.75,3144 3972.91,3259.16 4080.62,3259.16 4115,3293.54 4115,3313 v1(4241,3439)
  Layer 4 w10: v1(4241,3439) 4241,3471 4323.5,3553.5 4468.5,3553.5 v1(4511,3511)
  Bottom Layer w10: J2.17@3740,3083.98 3781.73,3083.98 v1(3841.75,3144)
DCMI_D2: J2.18 U1.117 | length 1185.9
  Top Layer w10: v1(4384,3646) 4384,3618.9 4374.5,3609.4 4374.5,3565.93 4411.69,3528.74 U1.117@4459.09,3528.74
  Layer 4 w10: v1(3805,3319) 3805,3335 3843.5,3373.5 3863.72,3373.5 4076.22,3586 4356,3586 4384,3614 v1(4384,3646)
  Bottom Layer w10: J2.18@3740,3115.47 3774.47,3115.47 3815.5,3156.5 3815.5,3237 3813,3239.5 3813,3311 v1(3805,3319)
DCMI_D3: J2.19 U1.118 | length 1093.3
  Top Layer w10: v1(4398,3586) 4413,3571 4413,3559.43 4424,3548.43 U1.118@4459.09,3548.43
  Layer 2 w10: v1(3688,3165) 3766.56,3243.56 3847.18,3243.56 3891.18,3287.56 3891.18,3309.06 3898.02,3315.89 3898.02,3407.02 4077,3586 v1(4398,3586)
  Bottom Layer w10: v1(3688,3165) 3706.03,3146.97 J2.19@3740,3146.97
DCMI_D4: J1.39 U1.140 | length 1233.2
  Top Layer w10: U1.140@4239.98,3905.33 4239.98,3847.02 v1(4244,3843)
  Layer 3 w10: v1(4244,3843) 4264.5,3843 4268,3839.5 4268,3696 4284,3680 4321,3680 4327.5,3686.5 4459.23,3686.5 4535.98,3609.75 4535.98,3494.9 4587.74,3443.14 4587.74,3287.26 4640,3235 v1(4847,3235)
  Bottom Layer w10: v1(4847,3235) 4855.03,3243.03 J1.39@4910,3243.03
DCMI_D5: J1.36 U1.145 | length 2059.3
  Top Layer w10: U1.145@4141.56,3905.33 4141.56,3950.56 4162,3971 4162,4165 v1(4172,4175)
  Layer 2 w10: 4534,3694 4556,3672 4571.5,3672 ; 4370.21,4174.58 4377.42,4174.58 4534,4018 4534,4010.79 4370.21,4174.58
  Layer 4 w10: v1(4172,4175) 4172,4134.36 4306.67,3999.69 4306.67,3941.33 4580.5,3667.5 4593,3667.5 4596,3664.5 v1(4596,3593)
  Bottom Layer w10: v1(4596,3593) 4612,3593 4669,3536 4807,3536 4828.5,3514.5 4828.5,3417.5 4864,3382 4864,3345.52 4872,3337.52 J1.36@4910,3337.52
DCMI_D6: J1.26 U1.167 | length 1878.5
  Top Layer w10: U1.167@3708.48,3905.33 3708.48,3942.89 3692.09,3959.28 3692.09,4034.59 3704,4046.5 v1(3785.5,4046.5)
  Layer 1 w10: v1(3785.5,4046.5) 3822.78,4083.78 3822.78,4093.28 3832,4102.5 4039.5,4102.5 4040.5,4103.5 4087.5,4103.5 4088,4103 4088,3906 4063,3881 4063,3795 4079.41,3778.59 4257.39,3778.59 4273.5,3762.48 4343.5,3762.48 4404.48,3701.5 4449.38,3701.5 4525.12,3625.75 4544,3625.75 4552.15,3617.61 4552.15,3598.73 4721.88,3429 4775,3429 v1(4791,3413)
  Bottom Layer w10: J1.26@4724.96,3369.02 4768,3369.02 4791,3392.02 v1(4791,3413)
DCMI_D7: J1.27 U1.168 | length 1876.4
  Top Layer w10: v1(3658,3995) 3673,3980 3673,3955.74 3688.8,3939.94 U1.168@3688.8,3905.33
  Layer 2 w10: 4336,4089 4504,3921 ; 4504,3410 4578,3336
  Layer 4 w10: v1(3658,3995) 3755,3898 4082,3898 4165,3815 4165,3648 4203,3610 v1(4324,3610)
  Bottom Layer w10: v1(4324,3610) 4340,3610 4544.93,3405.07 4592.5,3405.07 4622.07,3375.5 4660.99,3375.5 4686,3400.51 J1.27@4724.96,3400.51
DCMI_HREF: J2.3 U1.85 | length 1175.5
  Top Layer w10: U1.85@4318.72,2896.24 v1(4318.72,2947)
  Layer 2 w10: 3832.95,2643.03 3845.06,2643.03 3877.06,2675.03 3832.95,2675.03 ; 3833,2707 3833,2763 4000,2930 4057,2930 4101.5,2974.5 4141,2974.5 4205,3038.5 v1(4205,3041) ; 4157,3170 4240,3170
  Layer 3 w10: v1(4205,3041) 4205,3017 4235.04,2986.96 4254.5,2986.96 4270.5,2970.96 4294.76,2970.96 v1(4318.72,2947)
  Layer 4 w10: v1(3681,2680) 3806,2680 v1(3817,2691)
  Bottom Layer w10: v1(3681,2680) 3681,2656 3693.97,2643.03 J2.3@3740,2643.03
DCMI_PLCK: J1.47 U1.52 | length 2725.3
  Top Layer w10: U1.52@3669.11,2896.24 3669.11,2838.37 3667.5,2836.76 3667.5,2815 3680,2802.5 3716,2802.5 3717,2801.5 v1(3717,2514)
  Layer 2 w10: 4190,2378 4214,2402 4214,2645
  Layer 3 w10: v1(3717,2514) 3717,2506 3852.5,2370.5 v1(4043.5,2370.5)
  Bottom Layer w10: v1(4043.5,2370.5) 4227,2370.5 4250,2347.5 4388.5,2347.5 4420.12,2379.12 4551.57,2379.12 4602.73,2430.28 4912.95,2430.28 5035.97,2553.3 5035.97,2750.93 5034.94,2751.97 5034.94,2961.81 5005.69,2991.06 J1.47@4910,2991.06
DCMI_RESET: J1.25 J1.41 U1.138 U1.165 | length 1698.2
  Top Layer w10: v1(3744,3965) 3747.85,3961.15 U1.165@3747.85,3905.33 ; v1(4267,3976) 4279.35,3963.65 U1.138@4279.35,3905.33
  Layer 4 w10: v1(3744,3965) 3785,3924 4159,3924 ; v1(4267,3976) 4215,3924 4159,3924 ; v1(4777,3341) 4631.64,3486.36 4631.64,3504 4617.14,3518.5 4607.14,3518.5 4535,3590.64 4535,3600 4525.25,3609.75 4477.7,3609.75 4345.45,3742 4280,3742 4259.41,3762.59 4199.41,3762.59 4186,3776 4186,3897 4159,3924
  Bottom Layer w10: J1.25@4724.96,3337.52 4773.52,3337.52 v1(4777,3341)
DCMI_SCL: J1.22 U1.162 | length 1656.2
  Top Layer w10: v1(3792,3969) 3806.91,3954.09 U1.162@3806.91,3905.33
  Layer 1 w10: v1(3792,3969) 4091.5,3669.5 4431.5,3669.5 4472,3629 4472,3305 4519,3258 4765,3258 v1(4792,3285)
  Bottom Layer w10: J1.22@4724.96,3243.03 4761.03,3243.03 4774,3256 4774,3267 v1(4792,3285)
DCMI_SDA: J1.21 U1.161 | length 1795.7
  Top Layer w10: U1.161@3826.59,3905.33 3826.59,3857.41 v1(3828,3856)
  Layer 1 w10: v1(3828,3856) 3828,3840 4154.5,3513.5 4245.5,3513.5 4253,3506 4391,3506 4441,3456 4441,3313 4735.5,3018.5 4828,3018.5 4851,3041.5 v1(4851,3089)
  Bottom Layer w10: J1.21@4724.96,3211.54 4812.01,3211.54 4851,3172.54 v1(4851,3089)
DCMI_XCLK: J2.20 U1.119 | length 1371
  Top Layer w10: U1.119@4459.09,3568.11 4493.11,3568.11 v1(4511,3586)
  Layer 1 w10: v1(3792,3169) 3815,3146 3815,3120 3832,3103 3901,3103 3936.5,3138.5 4067.02,3138.5 4136.52,3208 4208,3208 4215.5,3215.5 4215.5,3271.5 4145.5,3271.5 4139,3278 4139,3369 4128,3380 4123,3380 v1(4115,3388)
  Layer 2 w10: v1(4115,3388) 4260,3533 4290.5,3533 4311,3553.5 4359,3553.5 4367.5,3545 4415,3545 4456,3586 v1(4511,3586)
  Bottom Layer w10: J2.20@3740,3178.46 3782.54,3178.46 v1(3792,3169)
ETH_MDC: J1.9 U1.33 | length 3560.8
  Top Layer w10: v1(3398,3111) 3398,3184.09 3408,3194.09 U1.33@3450,3194.09
  Layer 2 w10: 3368,2546 3583,2331 ; 3583,2169 3616,2136 ; 4425,2213 4547,2091 ; 4729,2091 4794,2156 4794,2338 4723,2409 4723,2551 4729,2557 4729,2836
  Layer 4 w10: v1(3398,3111) 3398,3166 3343,3221 3343,3252 3360,3269 3432,3269 3494.5,3331.5 3520.37,3331.5 3569.37,3282.5 3722,3282.5 3768.5,3236 3768.5,3152 3776.5,3144 3805.5,3144 3829,3167.5 3865.25,3167.5 3878.25,3154.5 4034.21,3154.5 4067.18,3187.48 4311,3187.48 4377.48,3121 4613,3121 4765,2969 v1(4812,2969)
  Bottom Layer w10: J1.9@4724.96,2833.58 4761,2833.58 4761,2841 4812,2892 v1(4812,2969)
ETH_MDIO: J1.4 U1.42 | length 2857.3
  Top Layer w10: v1(3368,3021) 3372.07,3016.93 U1.42@3450,3016.93
  Layer 2 w10: 4756,3389 4758,3387 ; 4756,3923 4800,3967 4924,3967 4959,3932 5029,3932 5049,3952 5049,4059 4882,4226
  Layer 3 w10: v1(3368,3021) 3368,2996 3549.87,2814.13 3549.87,2775 3503.87,2729 3393.5,2729 3384.5,2720 3384.5,2627 3470.5,2541 3741,2541 3759,2559 3934,2559 3976.5,2601.5 4356.5,2601.5 4374,2584 v1(4672,2584)
  Bottom Layer w10: v1(4672,2584) 4680.49,2592.49 4680.49,2668.6 4688,2676.1 J1.4@4724.96,2676.1
FMC_A0: U1.16 U3.23 | length 1751.5
  Top Layer w10: U1.16@3450,3528.74 3493,3528.74 3503,3538.74 3503,3554 3512,3563 v1(3579,3563) ; v1(4659,2951) 4729.05,2880.95 U3.23@4729.05,2785
  Layer 3 w10: v1(3579,3563) 3654.18,3487.82 3734.79,3487.82 3746.12,3476.5 3869.69,3476.5 3927.69,3418.5 4164.32,3418.5 4448.96,3133.85 4597.15,3133.85 4659,3072 v1(4659,2951)
FMC_A1: U1.17 U3.24 | length 2534.2
  Top Layer w10: U1.17@3450,3509.06 3380.13,3509.06 3377.57,3506.5 3174,3506.5 3174,3238.56 3312.5,3100.06 3312.5,2997.5 3329.5,2980.5 3329.5,2895.78 3396.39,2828.89 3396.39,2816 3406.89,2805.5 3466.5,2805.5 3577.47,2694.53 3577.47,2682.61 3589.39,2682.61 v1(3614.06,2657.94) ; v1(4664,2693.75) 4664,2698 4697.56,2731.56 U3.24@4697.56,2785
  Layer 3 w10: v1(3614.06,2657.94) 3624.06,2657.94 3641.5,2640.5 3736.5,2640.5 3747.5,2651.5 3866.06,2651.5 3872.5,2657.94 4583.94,2657.94 4593.5,2667.5 4637.75,2667.5 v1(4664,2693.75)
FMC_A2: U1.18 U3.25 | length 2076.1
  Top Layer w10: v1(3353.5,3171.5) 3326.54,3198.46 3326.54,3223.5 3324.5,3225.54 3324.5,3450.19 3360,3485.69 3388.76,3485.69 3392.44,3489.37 U1.18@3450,3489.37 ; v1(4649,2858) 4666.06,2840.94 U3.25@4666.06,2785
  Layer 3 w10: v1(3353.5,3171.5) 3375.66,3193.66 3531.06,3193.66 3592.9,3255.5 4123.5,3255.5 4247.5,3131.5 4247.5,3051 4256,3042.5 4308.86,3042.5 4480.86,2870.5 4532.98,2870.5 4571.48,2832 4623,2832 v1(4649,2858)
FMC_A3: U1.19 U3.26 | length 1925.2
  Top Layer w10: v1(3367,3231) 3340.5,3257.5 3340.5,3415.5 3394.69,3469.69 U1.19@3450,3469.69 ; v1(4493,2899) 4553,2839 4624,2839 4634.57,2828.43 U3.26@4634.57,2785
  Layer 3 w10: v1(3367,3231) 3330,3194 3330,3160 3342,3148 3449,3148 3465,3164 v1(3582,3164)
  Layer 4 w10: v1(3582,3164) 3654,3164 3692,3126 3692,3104 3736,3060 3802,3060 3844,3018 3864.68,3018 3973.68,2909 4073,2909 4083,2899 v1(4493,2899)
FMC_A4: U1.20 U3.29 | length 3274.8
  Top Layer w10: U1.20@3450,3450 3541,3450 3573,3482 3695,3482 3778.5,3398.5 3808,3398.5 3826,3380.5 3826,3361 v1(3853,3334) ; v1(4600,2380) 4608,2380 4634.57,2353.43 U3.29@4634.57,2312.56
  Layer 1 w10: v1(3385,2932) 3385,2778 3415,2748 3558,2748 3657,2649 3844,2649 3869,2624 3869,2496 3904,2461 4063.03,2461 4222.02,2302.02 4252.98,2302.02 4288,2267 4288,2169 4320,2137 4401,2137 4440,2176 4440,2323 4480,2363 4583,2363 v1(4600,2380)
  Layer 2 w10: v1(3385,2932) 3434.29,2981.29 3434.29,3158.45 3618.84,3343 3844,3343 v1(3853,3334)
FMC_A5: U1.21 U3.30 | length 2144.3
  Top Layer w10: U1.21@3450,3430.32 3576,3430.32 3596.68,3451 3636,3451 3849.5,3237.5 3875,3237.5 3896.5,3216 3896.5,3195.5 v1(3979,3113) ; v1(4510,2516) 4448,2454 4448,2310 4496,2262 4656.06,2262 4666.06,2272 U3.30@4666.06,2312.56
  Layer 1 w10: v1(3979,3113) 4067,3113 4076,3104 4076,2966.34 4118.84,2923.5 4203,2923.5 4246.5,2880 4246.5,2741 4471.5,2516 v1(4510,2516)
FMC_A6: U1.60 U3.31 | length 1252.8
  Top Layer w10: U1.60@3826.59,2896.24 3826.59,2760.39 3939.48,2647.5 4359.31,2647.5 4465.01,2541.81 4530.52,2541.81 4540.59,2531.73 4540.59,2490.76 4560,2471.35 4600.97,2471.35 4697.56,2374.76 U3.31@4697.56,2312.56
FMC_A7: U1.63 U3.32 | length 1179.2
  Top Layer w10: U1.63@3885.65,2896.24 3885.65,2790.35 4012.5,2663.5 4379.11,2663.5 4484.81,2557.81 4538.52,2557.81 4729.05,2367.27 U3.32@4729.05,2312.56
FMC_A8: U1.64 U3.33 | length 1169.4
  Top Layer w10: U1.64@3905.33,2896.24 3905.33,2848 3944.8,2808.54 3944.8,2781.7 3968,2758.5 4075.27,2758.5 4154.27,2679.5 4386.48,2679.5 4388.88,2677.1 4444.61,2677.1 4760.55,2361.16 U3.33@4760.55,2312.56
FMC_A9: U1.65 U3.34 | length 2107.7
  Top Layer w10: U1.65@3925.02,2896.24 3925.02,2976 3958.52,3009.5 4003.05,3009.5 4037.48,3043.93 4067.93,3043.93 v1(4100,3076) ; v1(4370,2310) 4434,2246 4768,2246 4792.05,2270.05 U3.34@4792.05,2312.56
  Layer 2 w10: 4079.01,2407.5 3908.01,2578.5 3680,2578.5 3667.5,2591 3667.5,2624 3781,2737.5 3815.5,2737.5 3815.5,2843.5 4031.93,3059.93 4083.93,3059.93 v1(4100,3076) ; 4293.5,2407.5 4370,2331
FMC_A10: U1.66 U3.22 | length 1292.2
  Top Layer w10: U1.66@3944.7,2896.24 3944.7,2944 3982.19,2981.48 4059.98,2981.48 4204,3125.5 v1(4204,3127) ; U3.22@4760.55,2785 4760.55,2839 4798,2839 v1(4804,2845)
  Layer 1 w10: v1(4204,3127) 4236.86,3094.14 4412.03,3094.14 4519.21,2986.96 4519.21,2939.31 4534.69,2923.82 4534.69,2874.31 4606,2803 4762,2803 v1(4804,2845)
FMC_A11: U1.67 U3.35 | length 1185.9
  Top Layer w10: U1.67@3964.39,2896.24 3964.39,2790.61 3980.5,2774.5 4088.98,2774.5 4136.72,2726.76 4234.24,2726.76 4251.5,2709.5 4400,2709.5 4414,2695.5 4451.54,2695.5 4778.49,2368.55 4807,2368.55 4823.54,2352 U3.35@4823.54,2312.56
FMC_A12: U1.106 U3.36 | length 3926.2
  Top Layer w10: v1(4370,3272.46) 4385,3272.46 4424.75,3312.21 U1.106@4459.09,3312.21 ; U3.36@4855.04,2312.56 4855.04,2376.04 v1(4880.5,2401.5)
  Layer 2 w10: v1(4370,3272.46) 4412.54,3272.46 4580,3105 4580,3008 4571.5,2999.5 4445.85,2999.5 4431.61,3013.74 4398.24,3013.74 4384.5,3000 4384.5,2961.96 4289.69,2867.15 4256,2867.15 4246.5,2857.65 4246.5,2800 4269,2777.5 4364.5,2777.5 v1(4434,2847) ; 4704,3952 4704,2233 4764,2173
  Layer 4 w10: v1(4434,2847) 4528,2847 4600,2775 4843,2775 4880.5,2737.5 v1(4880.5,2401.5)
FMC_A16_CLE: J2.23 U1.99 U4.16 | length 1888.3
  Top Layer w10: U1.99@4459.09,3174.41 4586,3174.41 4640,3228.41 v1(4640,3282) ; U4.16@4667.6,3583.74 4720,3583.74 4750,3553.74 4750,3515 v1(4805,3460)
  Layer 1 w10: v1(4640,3282) 4746,3388 4803,3388 4815,3400 4815,3450 v1(4805,3460)
  Layer 4 w10: v1(3792,3216) 3824,3216 3854,3246 4137.5,3246 4155.5,3264 4155.5,3376 4172,3392.5 4218.5,3392.5 4265,3346 4576,3346 v1(4640,3282)
  Bottom Layer w10: J2.23@3740,3272.95 3776,3272.95 3792,3256.95 v1(3792,3216)
FMC_A17_ALE: J2.21 U1.100 U4.17 | length 1798
  Top Layer w10: U1.100@4459.09,3194.09 4503,3194.09 4551,3242.09 ; 4551,3520 4589.5,3558.5 ; v1(4572,3644) 4572,3576 4589.5,3558.5 ; U4.17@4667.6,3564.05 4595.05,3564.05 4589.5,3558.5
  Layer 2 w10: v1(3667,3041) 3734,3041 3800.5,3107.5 3853.5,3107.5 3988.04,3242.04 4101.65,3242.04 4149.8,3290.2 4169.2,3290.2 4286,3407 4286,3470 4320,3504 4470.54,3504 4572,3605.46 v1(4572,3644)
  Bottom Layer w10: v1(3667,3041) 3645.05,3062.95 3645.05,3161.05 3693.96,3209.96 J2.21@3740,3209.96
FMC_A18: J2.14 U1.101 | length 949.7
  Top Layer w10: v1(4411,3210) 4414.78,3213.78 U1.101@4459.09,3213.78
  Layer 1 w10: v1(3689,2983) 3806.91,2983 3809.65,2985.74 3908.24,2985.74 4006.86,3084.36 v1(4037,3084.36)
  Bottom Layer w10: v1(3689,2983) 3695.49,2989.49 J2.14@3740,2989.49 ; v1(4037,3084.36) 4068.14,3115.5 4139.5,3115.5 4155.5,3099.5 4248.5,3099.5 4252.5,3095.5 4320,3095.5 4341,3116.5 4341,3140 v1(4411,3210)
FMC_BA0: U1.108 U3.20 | length 1659.1
  Top Layer w10: U1.108@4459.09,3351.58 4494.58,3351.58 4507.7,3364.7 4507.7,3402.7 4535,3430 v1(4535,3655.5) ; U3.20@4823.54,2785 4823.54,2821 4828,2825.46 4828,2892 4807.25,2912.75 4752.75,2912.75 4733,2932.5 4733,3080 4750.5,3097.5 4750.5,3113.5 4766.5,3129.5 4812.5,3129.5 v1(4824.75,3117.25)
  Layer 1 w10: v1(4535,3655.5) 4563,3683.5 4626.5,3683.5 4759.5,3550.5 4791.5,3550.5 4854.5,3487.5 4854.5,3274.5 4870.5,3258.5 4870.5,3163 v1(4824.75,3117.25)
FMC_BA1: U1.109 U3.21 | length 1421.4
  Top Layer w10: U1.109@4459.09,3371.26 4414.31,3371.26 4400.54,3357.49 4400.54,3318.17 4378.37,3296 4354.3,3296 4346.3,3288 4346.3,3260.7 4369.28,3237.72 4369.28,3162.42 4358,3151.14 4358,3000.13 4483,2875.13 4483,2721 4646,2558 4796.5,2558 4806.5,2568 4806.5,2704.67 4792.05,2719.12 U3.21@4792.05,2785
FMC_D0: J2.45 U1.104 U3.2 U4.29 | length 3724.8
  Top Layer w10: v1(4401,3147) 4401,3163 4387,3177 4387,3246 4413.83,3272.83 U1.104@4459.09,3272.83 ; U3.2@5390.47,2785 5390.47,2855 ; v1(5434,3357) 5434,2944.53 5390.47,2901 5390.47,2855 ; U4.29@5455,3505 5413,3505 5404,3496 5404,3416 5415,3405 5472,3405 5482,3395 5482,2946.53 5390.47,2855
  Layer 3 w10: v1(4401,3147) 4430.15,3117.85 4580.63,3117.85 4635.5,3062.98 4635.5,2929.5 4643,2922 4887.34,2922 4900,2934.66 4900,3245 5012,3357 v1(5434,3357)
  Bottom Layer w10: J2.45@3925.04,3052.48 4062.36,3052.48 4065.16,3055.27 4065.16,3087.18 4077.48,3099.5 4123.5,3099.5 4139.5,3083.5 4198.5,3083.5 4239.5,3042.5 4296.5,3042.5 v1(4401,3147)
FMC_D1: J2.46 U1.105 U3.4 U4.30 | length 3731.1
  Top Layer w10: U1.105@4459.09,3292.52 4519.52,3292.52 4559,3332 v1(4559,3436) ; v1(5327.48,2964) U3.4@5327.48,2785 5327.48,2724.52 5344,2708 5494,2708 5509,2723 5509,3514 5498.32,3524.68 U4.30@5455,3524.68
  Layer 2 w10: 3814,3018 3844,3018 3842.5,3016.5 ; 3852.5,3365.5 3852.5,3392.5 ; 4029.02,3018 4032,3018 4029.02,3020.98 4029.02,3018
  Layer 4 w10: v1(4049.98,3004.98) 4085.16,3040.16 4154.16,3040.16 4179,3065 4239,3065 4264,3040 4313.19,3040 4337.69,3015.5 4464.89,3015.5 4480.39,3000 4683,3000 4738.25,2944.75 4855.75,2944.75 4875,2964 4942,2964 ; v1(4559,3436) 4559,3425.5 4794.72,3189.78 4855.71,3189.78 4898,3147.49 4898,3008 4942,2964 ; v1(5327.48,2964) 4942,2964
  Bottom Layer w10: J2.46@3925.04,3020.98 4033.98,3020.98 v1(4049.98,3004.98)
FMC_D2: J2.47 U1.142 U3.5 U4.31 | length 5519.1
  Top Layer w10: U1.142@4200.61,3905.33 4200.61,4110.61 4251,4161 v1(4492,4161) 4820,4161 4833.5,4174.5 4897.15,4174.5 4910.65,4161 5174.5,4161 5191.5,4144 5191.5,3660.27 5307.4,3544.37 U4.31@5455,3544.37 5510.63,3544.37 5535,3520 5535,2720 5476,2661 5337.19,2661 5295.98,2702.2 U3.5@5295.98,2785
  Layer 2 w10: v1(4306,2801) 4306,2833 4452,2979 ; v1(4492,4161) 4563,4090 ; 4496.5,3754.5 4563,3821 4563,4090 ; 4562.06,2979 4452,2979 ; 4596.89,2999.89 4580.5,2983.5 4456.5,2983.5 4452,2979 ; 4596.89,3390.89 4646.32,3440.32 4646.32,3604.68 ; 4616.5,3033.44 4616.5,3304 4618,3305.5 4618,3353 4633.5,3368.5 ; 4633.5,4019.5 4563,4090
  Bottom Layer w10: J2.47@3925.04,2989.49 4026.48,2989.49 4034.49,2981.48 4068.97,2981.48 4124.98,3037.5 4154.87,3037.5 4198.37,2994 4220.41,2994 4239.03,2975.39 4282.17,2975.39 4290.2,2967.36 4290.2,2923.72 4306,2907.92 v1(4306,2801)
FMC_D3: J2.48 U1.143 U3.7 U4.32 | length 5436
  Top Layer w10: U1.143@4180.93,3905.33 4180.93,3810.07 4199,3792 4225,3792 v1(4244,3811) ; U3.7@5232.99,2785 5232.99,2725 ; v1(5305,2641) 5232.99,2713.01 5232.99,2725 ; U4.32@5455,3564.05 5522.95,3564.05 5530.32,3556.68 5538.34,3556.68 5551,3544.02 5551,2656 5532,2637 5320.99,2637 5232.99,2725
  Layer 4 w10: v1(4129,2998) 4136,2991 4242,2991 4262,2971 4341,2971 4351,2961 4465,2961 4488,2984 4593.5,2984 4637.75,2939.75 4637.75,2928 4653.75,2912 4896,2912 4927,2943 5033,2943 5069,2907 5270,2907 5305,2872 v1(5305,2641) 5351,2687 5351,2984 5338,2997 5058,2997 4936,3119 4936,3221 4898,3259 4774,3259 4656.5,3376.5 4632,3376.5 4620.5,3388 4620.5,3443 4394,3669.5 4289.5,3669.5 v1(4220,3739)
  Bottom Layer w10: J2.48@3925.04,2957.99 3977.01,2957.99 4004.5,2930.5 4061.5,2930.5 v1(4129,2998) ; v1(4220,3739) 4220,3787 v1(4244,3811)
FMC_D4: J2.49 U1.68 U3.8 U4.41 | length 3047.1
  Top Layer w10: v1(5201.5,2720) U3.8@5201.5,2785 ; U4.41@5455,3741.22 5598,3741.22 5600,3739.22 v1(5600,2720)
  Layer 1 w10: v1(5201.5,2720) v1(5600,2720)
  Layer 3 w10: v1(4126,2816) 4126,2800 4216.5,2709.5 4550.5,2709.5 4581.48,2740.48 4737.64,2740.48 4763.66,2766.5 5155,2766.5 v1(5201.5,2720)
  Bottom Layer w10: J2.49@3925.04,2926.5 3976.5,2926.5 4087,2816 v1(4126,2816)
FMC_D5: J2.50 U1.69 U3.10 U4.42 | length 2647.7
  Top Layer w10: U3.10@5138.5,2785 5138.5,2851.01 v1(5139,2851.5) 5138.5,2851.5 v1(5164,2877) ; v1(5361,3713) 5408.9,3760.9 U4.42@5455,3760.9
  Layer 3 w10: v1(4004,2798) 4000,2798 3963.5,2834.5 3963.5,2840 3976,2852.5 4073.5,2852.5 4098,2877 4279.23,2877 4380.73,2775.5 4506.5,2775.5 4509.52,2772.48 4705.02,2772.48 4731.66,2799.12 5086.62,2799.12 v1(5139,2851.5)
  Bottom Layer w10: J2.50@3925.04,2895 3968,2895 3979.5,2883.5 3979.5,2816 3990,2805.5 3996.5,2805.5 v1(4004,2798) ; v1(5164,2877) 5316,3029 5361,3029 v1(5361,3713)
FMC_D6: J2.51 U1.70 U3.11 U4.43 | length 3965.1
  Top Layer w10: U1.70@4023.44,2896.24 4023.44,2949.44 v1(4028,2954) ; U3.11@5107.01,2785 5107.01,2705.99 v1(5125,2688) ; U4.43@5455,3780.59 5593.41,3780.59 5630,3744 v1(5630,3341) v1(5630,2894)
  Layer 1 w10: v1(5125,2688) 5331,2894 v1(5630,2894)
  Layer 3 w10: v1(4287,3067.5) 4337,3067.5 4361.19,3043.31 4395.21,3043.31 4520.02,2918.5 4620.5,2918.5 4641.5,2897.5 4926.5,2897.5 5020,2991 5020,3296 5038,3314 5603,3314 v1(5630,3341)
  Layer 4 w10: v1(4028,2954) 4028,2970 4015.47,2982.53 4015.47,3015.91 4059.49,3059.93 4059.49,3073.99 4085,3099.5 4123.5,3099.5 4139.5,3083.5 4255,3083.5 4271,3067.5 v1(4287,3067.5)
FMC_D7: J2.52 U1.73 U3.13 U4.44 | length 4017.9
  Top Layer w10: v1(4003,2829) 4026,2852 4072,2852 4082.5,2862.5 U1.73@4082.5,2896.24 ; U3.13@5044.01,2785 5044.01,2852 5029.01,2867 4968,2867 4956,2879 4956,2918 4992,2954 5261,2954 5312,3005 5338,3005 5373,3040 5373,3344 5410,3381 v1(5458,3381) ; U4.44@5455,3800.27 5505.63,3800.27 ; v1(5545,3830) 5535.36,3830 5505.63,3800.27 ; v1(5552,3816) 5551.73,3816 5536,3800.27 5505.63,3800.27
  Layer 3 w10: v1(4003,2829) 4076,2829 4086.5,2839.5 4164.5,2839.5 4183,2821 4200,2821 4246,2775 4330,2775 4379,2726 4535,2726 4565.48,2756.48 4713.48,2756.48 4740,2783 5256,2783 v1(5458,2985)
  Bottom Layer w10: 5426,3581.27 5458,3613.27 ; v1(5458,2985) v1(5458,3381) 5458,3613.27 ; 5545,3700.27 v1@5545,3809 ; v1(5545,3830) v1@5545,3809 ; v1(5552,3816) v1@5545,3809 ; 5458,3613.27 5458,3722 v1@5545,3809
FMC_D8: J2.53 U1.74 U3.42 | length 1464.4
  Top Layer w10: U1.74@4102.19,2896.24 4102.19,2802.31 4112,2792.5 4117.86,2792.5 4166.86,2743.5 4280.5,2743.5 v1(4291,2733) ; U3.42@5044.01,2312.56 5044.01,2368 5076.01,2400 v1(5133,2400)
  Layer 1 w10: v1(4291,2733) 4297.7,2726.3 4406.7,2726.3 4497.5,2635.5 4741.5,2635.5 4768.5,2608.5 4806,2608.5 4824.5,2627 4906,2627 v1(5133,2400)
FMC_D9: J2.54 U1.75 U3.44 | length 3189.1
  Top Layer w10: U1.75@4121.87,2896.24 4121.87,2935.87 v1(4133,2947) ; v1(5012,2128) 5107.01,2223.01 U3.44@5107.01,2312.56
  Layer 2 w10: 4112,2380 4112,2453 ; 4405,2788 4432,2815 4465,2815 ; 4468,4137 4468,4176 4487,4195 4615,4195 ; 4512,3223 4602,3313 4602,3375
  Layer 3 w10: v1(3994,2721) 3670.13,2721 3648,2743.13 3648,2836.07 3714.38,2902.44 4073.81,2902.44 4118.37,2947 v1(4133,2947)
  Layer 4 w10: v1(3994,2721) 3994,2666 4157.5,2502.5 4187.25,2502.5 4215.25,2474.5 4371.5,2474.5 4658,2188 4777,2188 4837,2128 v1(5012,2128)
  Bottom Layer w10: J2.54@3925.04,2769.02 3977.98,2769.02 3994,2753 v1(3994,2721)
FMC_D10: J2.55 U1.76 U3.45 | length 1678
  Top Layer w10: v1(5129,2192) 5129,2263.5 5138.5,2273 U3.45@5138.5,2312.56
  Layer 4 w10: v1(4090,2703) 4129.5,2663.5 4217.5,2663.5 4247.5,2693.5 4500.49,2693.5 4849.08,2344.91 4881.09,2344.91 5034,2192 v1(5129,2192)
  Bottom Layer w10: J2.55@3925.04,2737.52 3960.98,2737.52 3970.5,2728 3970.5,2698 3994.5,2674 4045,2674 ; v1(4090,2703) v1@4089.73,2702.73 ; v1(4090.22,2702.73) v1@4089.73,2702.73 ; 4045,2674 4061,2674 v1@4089.73,2702.73 ; 4045,2674 4073.73,2702.73 v1@4089.73,2702.73
FMC_D11: J2.56 U1.77 U3.47 | length 1474
  Top Layer w10: U1.77@4161.24,2896.24 4161.24,2935 4164,2937.76 v1(4164,2947) ; v1(5185,2421) 5201.5,2404.5 U3.47@5201.5,2312.56
  Layer 4 w10: v1(4164,2947) 4187.69,2923.31 4512.69,2923.31 4556,2880 4556,2848 4568,2836 4582,2836 4627,2791 4899,2791 4934,2756 4934,2672 v1(5185,2421)